# EAGLE board PROIECT TSC v114 (EAGLE 9.7.0)
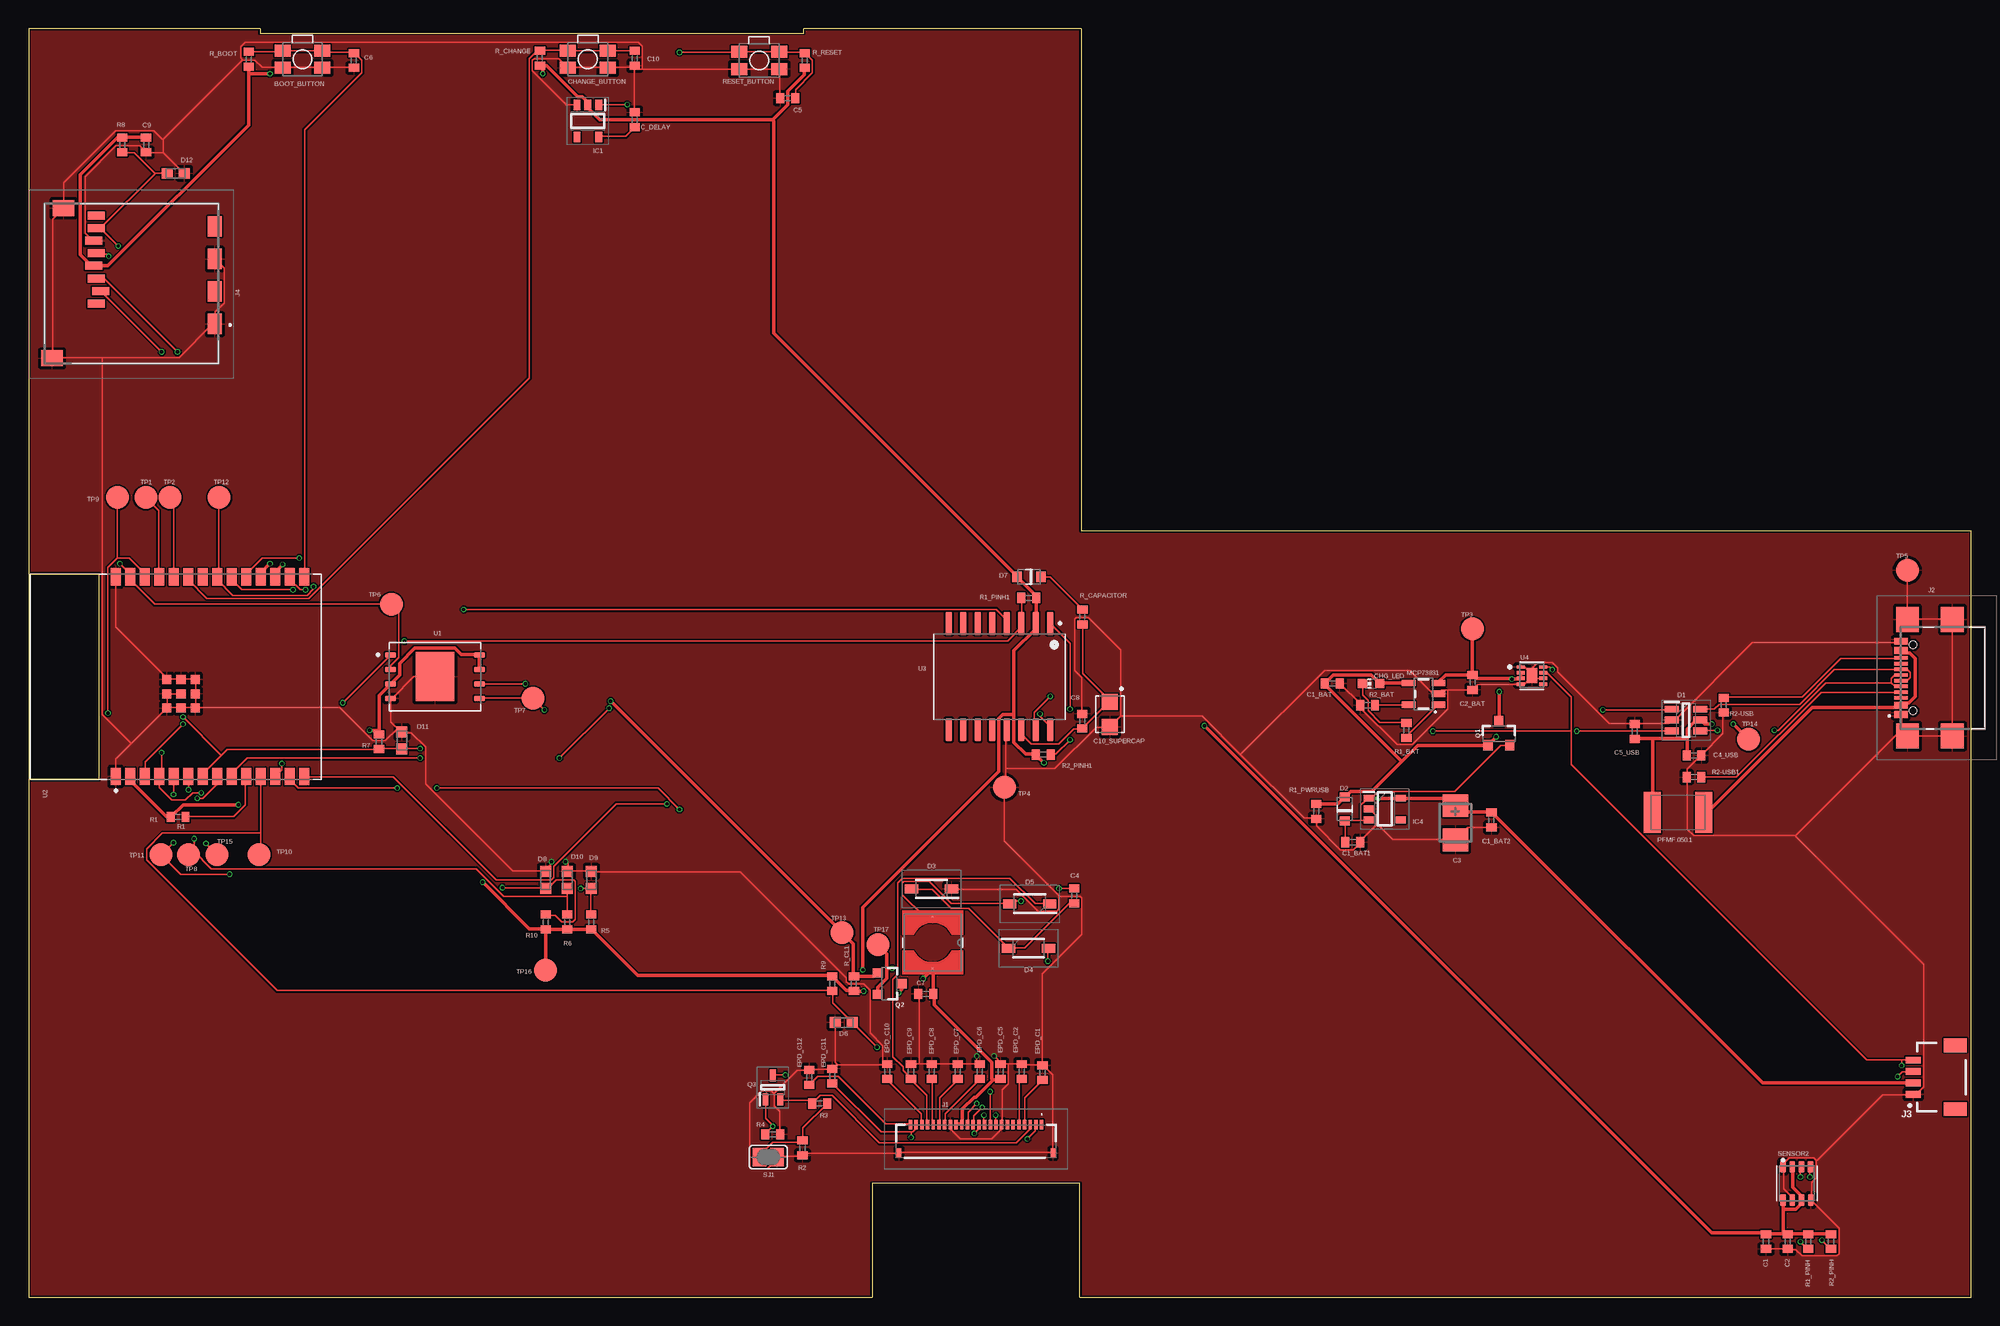
[diagram p0: board, top side]
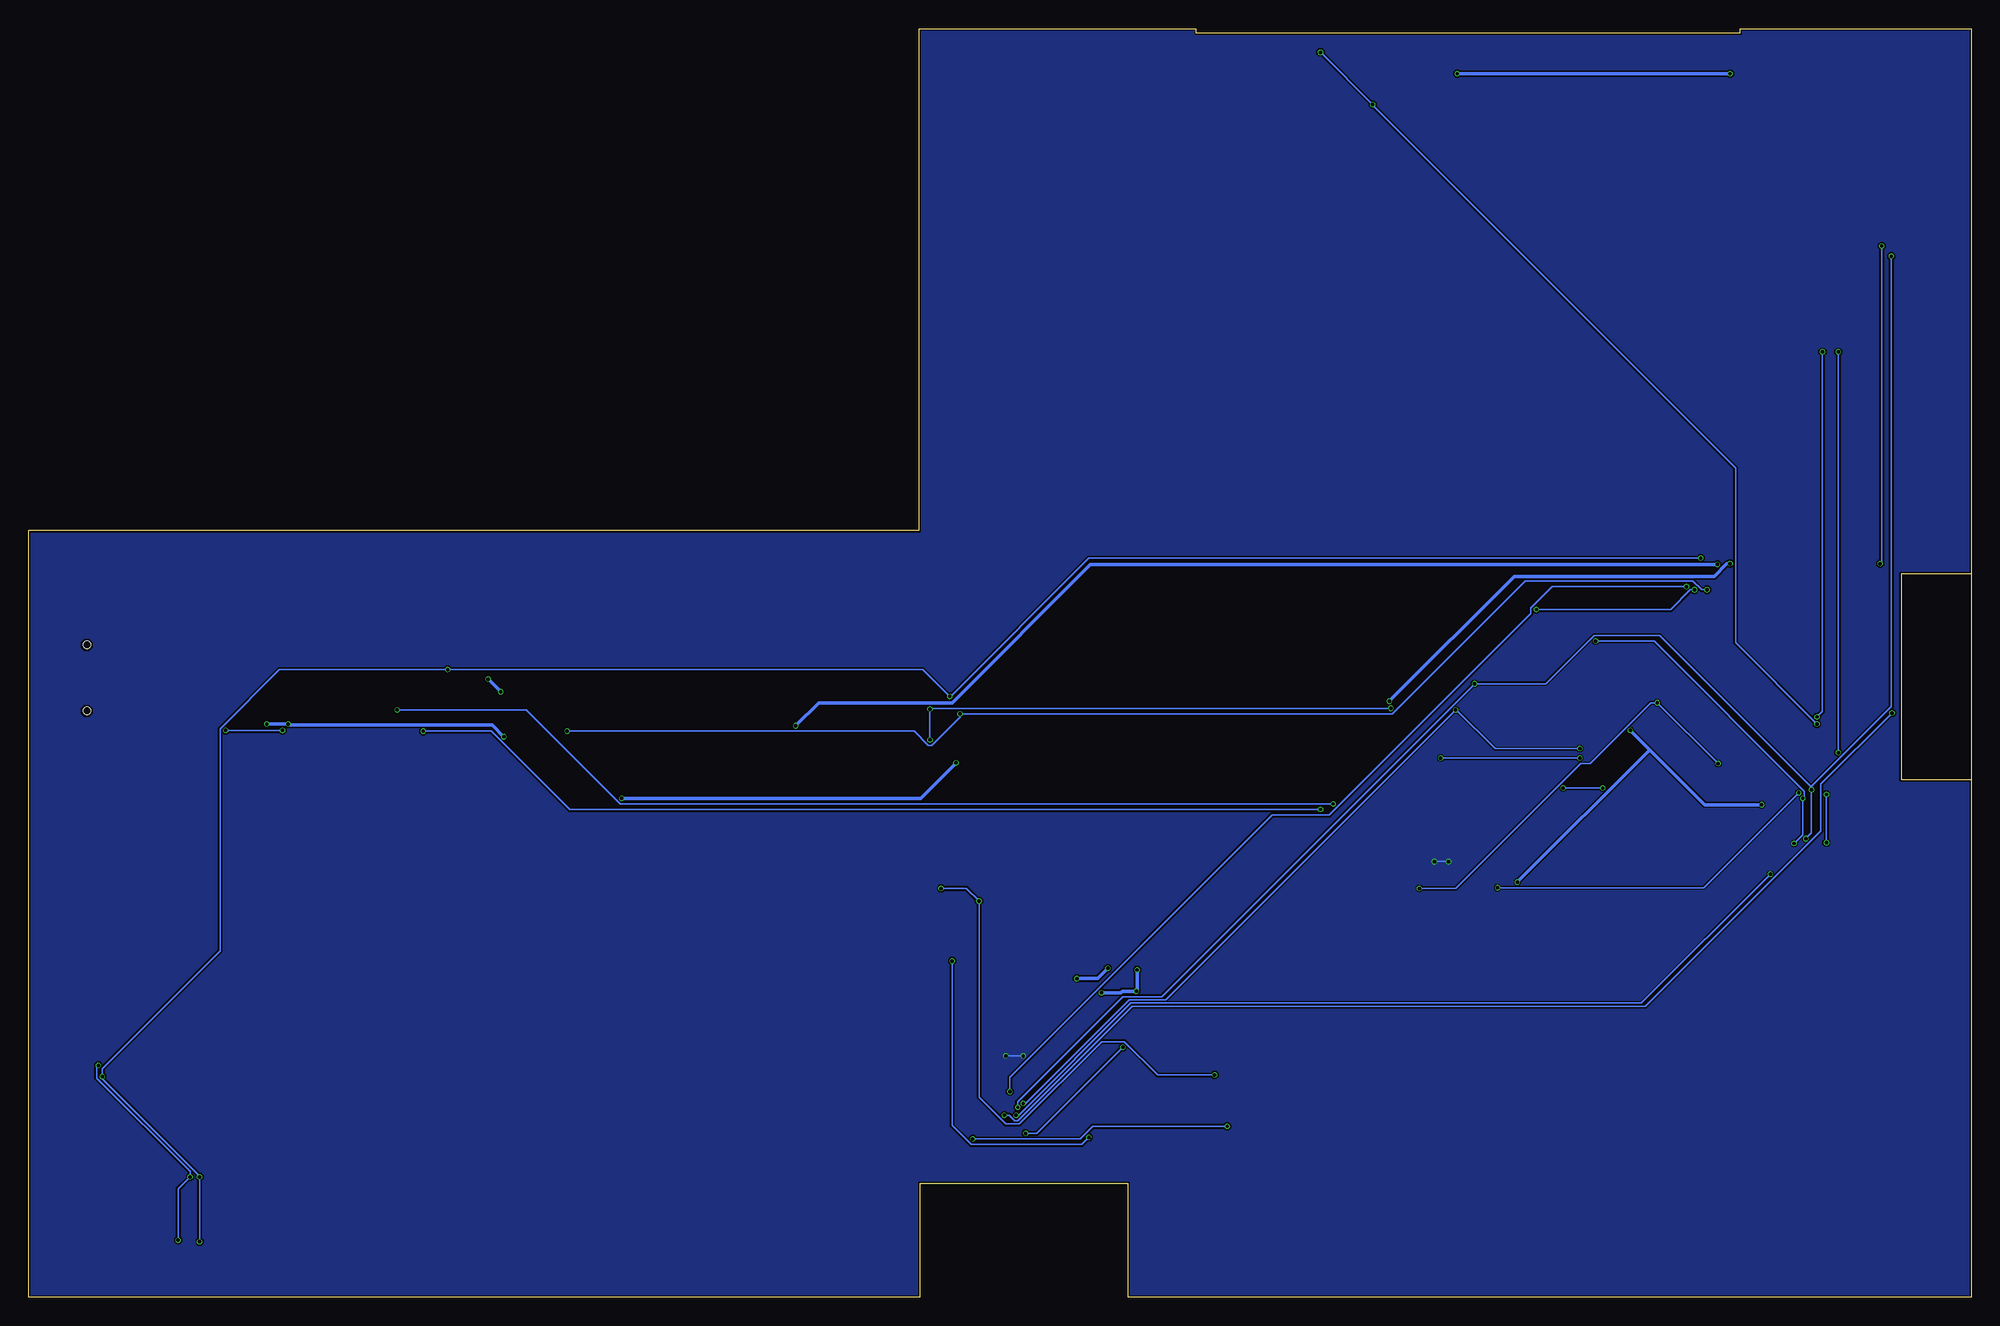
[diagram p1: board, bottom side, seen from below]

Size 170.2 x 111.2 mm. Coordinates in mm from the lower left corner, seen from the top.
Outline: 0,63.4 0,111.2 20.3,111.2 20.3,110.8 67.9,110.8 67.9,111.2 92.2,111.2 92.2,67.2 170.2,67.2 170.2,0 92.1,0 92.1,10 73.9,10 73.9,0 0,0 0,45.4
Outline: 0,63.4 0,45.4
Outline: 0,63.4 6.16,63.4 6.16,45.4 0,45.4
Copper layers (1*16): Top / Bottom
Stack-up Default Layer Stack: Top User Defined 0.035mm / Dielectric-1 User Defined 1mm / Bottom User Defined 0.035mm
Design rules: minimum copper width classes=1 0.3mm, minimum copper width classes=0 0.15mm, minimum copper width 5mil, minimum drill size 0.3mm, copper clearance wire_polygon to wire_polygon 5mil, copper clearance wire_polygon to pad_smd 5mil, copper clearance wire_polygon to via 5mil, copper clearance pad_smd to pad_smd 5mil, copper clearance pad_smd to via 5mil, copper clearance via to via 5mil, copper clearance smd to pad (same net) 0.11mm, copper clearance smd to via (same net) 0.11mm, copper clearance smd to smd (same net) 0.11mm, dimension clearance 0.2mm, via restrict clearance 5mil, restrict clearance 5mil, drill distance 6mil, keepout clearance 0mil
Net classes: 0 default: width 0.15 mm; 1 POWER: width 0.3 mm

## Footprints (pad centres in the part's own frame; a part is rotated, then mirrored left to right if it is on the bottom)
MYBUTTON = smd 1.4 x 1.05: 1 1.75,0.75; 2 -1.75,0.75; 3 -1.75,-0.75; 4 1.75,-0.75
EAGLE-LTSPICE_C0402 = smd 0.7 x 0.9: 1 -0.65,0; 2 0.65,0
RCL_CT3528 = smd 2 x 2.2: + -1.5,0; - 1.5,0
CAPCP3225X100N = smd 1.4 x 1.4: 1 -1.1,0; 2 1.1,0
ADAFRUIT_CHIP-LED0603 = smd 0.8 x 0.8: A 0,-0.75; C 0,0.75
SOT95P280X145-6N = smd 1.2 x 0.6: 1 -1.25,0.95; 2 -1.25,0; 3 -1.25,-0.95; 4 1.25,-0.95; 5 1.25,0; 6 1.25,0.95
ESP32_WROVER_AVX---SD0805S020S1R0_AVX_SD0805S020S1R0_0 = smd 0.8 x 0.9: 1 -1.05,0; 2 1.05,0
SOD3716X135N = smd 1.15 x 0.8: 1 -1.75,0; 2 1.75,0
DIOC1608X36N = smd 0.97 x 0.94: 1 -0.75,0; 2 0.75,0
SOT95P280X125-5N = smd 0.9 x 0.6: 1 -1.4,0.95; 2 -1.4,0; 3 -1.4,-0.95; 4 1.4,-0.95; 5 1.4,0.95
SOT95P280X120-5N = smd 0.9 x 0.6: 1 -1.4,0.95; 2 -1.4,0; 3 -1.4,-0.95; 4 1.4,-0.95; 5 1.4,0.95
FH34SRJ24S05SH99 = smd 0.3 x 0.8: 1 5.75,1.45; 2 5.25,1.45; 3 4.75,1.45; 4 4.25,1.45; 5 3.75,1.45; 6 3.25,1.45; 7 2.75,1.45; 8 2.25,1.45; 9 1.75,1.45; 10 1.25,1.45; 11 0.75,1.45; 12 0.25,1.45; 13 -0.25,1.45; 14 -0.75,1.45; 15 -1.25,1.45; 16 -1.75,1.45; 17 -2.25,1.45; 18 -2.75,1.45; 19 -3.25,1.45; 20 -3.75,1.45; 21 -4.25,1.45; 22 -4.75,1.45; 23 -5.25,1.45; 24 -5.75,1.45 | smd 0.4 x 0.8: MP1 6.75,-1.05; MP2 -6.75,-1.05
SAMACSYS_PARTS_USB4110GFA = smd 0.3 x 1.15: A1 -3.35,3.678; A4 -2.55,3.678; A5 -1.25,3.678; A6 -0.25,3.678; A7 0.25,3.678; A8 1.25,3.678; A9 2.55,3.678; A12 3.35,3.678; B1 3.05,3.678; B4 2.25,3.678; B5 1.75,3.678; B6 0.75,3.678; B7 -0.75,3.678; B8 -1.75,3.678; B9 -2.25,3.678; B12 -3.05,3.678 | smd 2.18 x 2: MP1 -5.11,-0.827; MP2 5.11,-0.827; MP3 -5.11,3.103; MP4 5.11,3.103 | hole 0.65: -2.89,2.603; 2.89,2.603
JST04_1MM_RA = smd 0.6 x 1.35: 1 -1.5,0; 2 -0.5,0; 3 0.5,0; 4 1.5,0 | smd 1.2 x 2: NC1 2.8,-3.675; NC2 -2.8,-3.675
112ATAARR03ATTEND = smd 1.8 x 1.2: G1 10.6,10.4; G2 4.9,10.4; S1 7.75,10.4; S2 2.05,10.4 | smd 1.4 x 1.9: G3 13.6,-3.85; G4 0.45,-2.85 | smd 0.7 x 1.5: P1 8.8,0; P2 7.7,0.4; P3 6.6,0; P4 5.5,-0.2; P5 4.4,0; P6 3.3,-0.2; P7 2.2,0; P8 1.1,0
IND_4828-WE-TPC_WRE = smd 0.127 x 0.127: 1 -2.286,0; 2 2.286,0
ESP32_WROVER_SPARKFUN-IC-POWER_SOT23-5 = smd 0.55 x 1.2: 1 -0.95,-1.3; 2 0,-1.3; 3 0.95,-1.3; 4 0.95,1.3; 5 -0.95,1.3
ESP32C6_VARISTOR_CT/CN1812 = smd 1.5 x 3.6: 1 -2.25,0; 2 2.25,0
ESP32_WROVER_SPARKFUN-DISCRETESEMI_SOT23-3 = smd 0.8 x 0.9: 1 -0.95,-1; 2 0.95,-1; 3 0,1.1
SOT65P210X110-3N = smd 1.05 x 0.5: 1 -1.05,0.65; 2 -1.05,-0.65; 3 1.05,0
ESP32_WROVER_EAGLE-LTSPICE_R0402 = smd 0.7 x 0.9: 1 -0.65,0; 2 0.65,0
ESP32_WROVER_BME680_PSON80P300X300X100-8N = smd 1.016 x 0.5: 1 1.458,1.2; 2 1.458,0.4; 3 1.458,-0.4; 4 1.458,-1.2; 5 -1.458,-1.22; 6 -1.458,-0.4; 7 -1.458,0.4; 8 -1.458,1.2
SJ = smd 1.168 x 1.6: 1 -0.762,0; 2 0.762,0
TP20R = smd 2 x 2: TP 0,0
SON127P600X800X80-9N = smd 0.94 x 0.44: 1 -3.895,1.905; 2 -3.895,0.635; 3 -3.895,-0.635; 4 -3.895,-1.905; 5 3.895,-1.905; 6 3.895,-0.635; 7 3.895,0.635; 8 3.895,1.905 | smd 3.4 x 4.3: 9 0,0
XCVR_ESP32-C6-WROOM-1-N8 = smd 1.5 x 0.9: 1 -8.75,5.26; 2 -8.75,3.99; 3 -8.75,2.72; 4 -8.75,1.45; 5 -8.75,0.18; 6 -8.75,-1.09; 7 -8.75,-2.36; 8 -8.75,-3.63; 9 -8.75,-4.9; 10 -8.75,-6.17; 11 -8.75,-7.44; 12 -8.75,-8.71; 13 -8.75,-9.98; 14 -8.75,-11.25; 15 8.75,-11.25; 16 8.75,-9.98; 17 8.75,-8.71; 18 8.75,-7.44; 19 8.75,-6.17; 20 8.75,-4.9; 21 8.75,-3.63; 22 8.75,-2.36; 23 8.75,-1.09; 24 8.75,0.18; 25 8.75,1.45; 26 8.75,2.72; 27 8.75,3.99; 28 8.75,5.26 | smd 0.8 x 0.8: 29_1 -2.755,0.79; 29_2 -1.505,0.79; 29_3 -0.255,0.79; 29_4 -2.755,-0.46; 29_5 -1.505,-0.46; 29_6 -0.255,-0.46; 29_7 -2.755,-1.71; 29_8 -1.505,-1.71; 29_9 -0.255,-1.71
SOIC127P1032X265-16N = smd 2.05 x 0.59: 1 -4.655,4.445; 2 -4.655,3.175; 3 -4.655,1.905; 4 -4.655,0.635; 5 -4.655,-0.635; 6 -4.655,-1.905; 7 -4.655,-3.175; 8 -4.655,-4.445; 9 4.655,-4.445; 10 4.655,-3.175; 11 4.655,-1.905; 12 4.655,-0.635; 13 4.655,0.635; 14 4.655,1.905; 15 4.655,3.175; 16 4.655,4.445
SON50P200X200X80-9N = smd 0.76 x 0.27: 1 -0.985,0.75; 2 -0.985,0.25; 3 -0.985,-0.25; 4 -0.985,-0.75; 5 0.985,-0.75; 6 0.985,-0.25; 7 0.985,0.25; 8 0.985,0.75 | smd 0.9 x 1.3: 9 0,0

## Placement (x,y rotation side)
BOOT_BUTTON  BUTTON_CUSYOMV1  [MYBUTTON]  24,108.5 180 top
C1  100nF  [EAGLE-LTSPICE_C0402]  152.2,4.9 270 top
C1_BAT  4.7uF  [EAGLE-LTSPICE_C0402]  114.2,53.8 0 top
C1_BAT1  4.7uF  [EAGLE-LTSPICE_C0402]  116,39.9 0 top
C1_BAT2  4.7uF  [EAGLE-LTSPICE_C0402]  128.15,41.84 270 top
C2  100nF  [EAGLE-LTSPICE_C0402]  154.1,4.9 270 top
C2_BAT  4.7uF  [EAGLE-LTSPICE_C0402]  126.5,53.9 270 top
C3  100uF  [RCL_CT3528]  125,41.6 270 top
C4  4.7uF/25V  [EAGLE-LTSPICE_C0402]  91.6,35.2 90 top
C4_USB  100nF  [EAGLE-LTSPICE_C0402]  145.9,47.5 0 top
C5  1uF  [EAGLE-LTSPICE_C0402]  66.5,105.1 180 top
C5_USB  4.7uF  [EAGLE-LTSPICE_C0402]  140.7,49.6 90 top
C6  100nF  [EAGLE-LTSPICE_C0402]  28.5,108.4 270 top
C7  10uF  [EAGLE-LTSPICE_C0402]  78.6,26.6 180 top
C8  100nF  [EAGLE-LTSPICE_C0402]  92.3,50.5 90 top
C9  100uF  [EAGLE-LTSPICE_C0402]  10.3,101 270 top
C10  100nF  [EAGLE-LTSPICE_C0402]  53.1,108.58 270 top
C10_SUPERCAP  CPH3225A  [CAPCP3225X100N]  94.73,51.09 270 top
C_DELAY  100nF  [EAGLE-LTSPICE_C0402]  53.1,103.2 90 top
CHANGE_BUTTON  BUTTON_CUSYOMV1  [MYBUTTON]  49,108.5 180 top
CHG_LED  [ADAFRUIT_CHIP-LED0603]  117.6,53.8 90 top
D1  USBLC6-2SC6Y  [SOT95P280X145-6N]  145.2,50.6 0 top
D2  ESP32_WROVER_AVX---SD0805S020S1R0_AVX_SD0805S020S1R0_0_0AVX_SD0805S020S1R0_0_0  [ESP32_WROVER_AVX---SD0805S020S1R0_AVX_SD0805S020S1R0_0]  115.3,42.8 90 top
D3  MBR0530  [SOD3716X135N]  79.1,35.8 180 top
D4  MBR0530  [SOD3716X135N]  87.6,30.6 0 top
D5  MBR0530  [SOD3716X135N]  87.7,34.5 180 top
D6  PGB1010603MR  [DIOC1608X36N]  71.4,24.1 0 top
D7  ESP32_WROVER_AVX---SD0805S020S1R0_AVX_SD0805S020S1R0_0_0AVX_SD0805S020S1R0_0_0  [ESP32_WROVER_AVX---SD0805S020S1R0_AVX_SD0805S020S1R0_0]  87.64,63.16 180 top
D8  PGB1010603MR  [DIOC1608X36N]  45.3,36.6 270 top
D9  PGB1010603MR  [DIOC1608X36N]  49.3,36.6 270 top
D10  PGB1010603MR  [DIOC1608X36N]  47.2,36.6 270 top
D11  PGB1010603MR  [DIOC1608X36N]  32.7,48.8 270 top
D12  PGB1010603MR  [DIOC1608X36N]  12.9,98.5 180 top
EPD_C1  1uF/50V  [EAGLE-LTSPICE_C0402]  88.83,19.7 90 top
EPD_C2  1uF/50V  [EAGLE-LTSPICE_C0402]  87,19.8 90 top
EPD_C5  1uF/50V  [EAGLE-LTSPICE_C0402]  85.15,19.8 90 top
EPD_C6  1uF/50V  [EAGLE-LTSPICE_C0402]  83.33,19.8 90 top
EPD_C7  1uF/50V  [EAGLE-LTSPICE_C0402]  81.4,19.8 90 top
EPD_C8  1uF/50V  [EAGLE-LTSPICE_C0402]  79.13,19.8 90 top
EPD_C9  1uF/50V  [EAGLE-LTSPICE_C0402]  77.3,19.8 90 top
EPD_C10  1uF/50V  [EAGLE-LTSPICE_C0402]  75.23,19.8 90 top
EPD_C11  1uF/50V  [EAGLE-LTSPICE_C0402]  70.4,19.4 90 top
EPD_C12  1uF/50V  [EAGLE-LTSPICE_C0402]  68.4,19.3 90 top
IC1  BD5229G-TR  [SOT95P280X125-5N]  49,103.1 270 top
IC4  XC6220A331MR-G  [SOT95P280X120-5N]  118.8,42.8 0 top
J1  FH34SRJ-24S-0.5SH_99_  [FH34SRJ24S05SH99]  83,13.7 0 top
J2  SAMACSYS_PARTS_USB4110-GF-A  [SAMACSYS_PARTS_USB4110GFA]  167.7,54.3 90 top
J3  QWIIC_RIGHT_ANGLE  [JST04_1MM_RA]  165.1,19.3 90 top
J4  112A-TAAR-R03_ATTEND  [112ATAARR03ATTEND]  5.92,95.9 270 top
L1  68uH  [IND_4828-WE-TPC_WRE]  79.2,31.1 270 top
MCP73831  ESP32_WROVER_SPARKFUN-IC-POWER_MCP73831  [ESP32_WROVER_SPARKFUN-IC-POWER_SOT23-5]  122.2,52.9 90 top
PFMF.050.1  ESP32C6_VARISTORCN1812  [ESP32C6_VARISTOR_CT/CN1812]  144.5,42.5 180 top
Q1  20V/4.2A/52mΩ/1.4W  [ESP32_WROVER_SPARKFUN-DISCRETESEMI_SOT23-3]  128.8,49.4 0 top
Q2  20V/4.2A/52mΩ/1.4W  [ESP32_WROVER_SPARKFUN-DISCRETESEMI_SOT23-3]  75.4,27.5 270 top
Q3  SI1308EDL-T1-GE3  [SOT65P210X110-3N]  65.2,18.4 90 top
R1  10k  [ESP32_WROVER_EAGLE-LTSPICE_R0402]  13.1,42.1 180 top
R1_BAT  200  [ESP32_WROVER_EAGLE-LTSPICE_R0402]  120.7,49.7 270 top
R1_PINH  10k  [ESP32_WROVER_EAGLE-LTSPICE_R0402]  155.9,4.9 90 top
R1_PINH1  10k  [ESP32_WROVER_EAGLE-LTSPICE_R0402]  87.62,61.31 180 top
R1_PWRUSB  100k  [ESP32_WROVER_EAGLE-LTSPICE_R0402]  112.8,42.6 90 top
R2  2.2  [ESP32_WROVER_EAGLE-LTSPICE_R0402]  67.8,13.1 90 top
R2-USB  5k1  [ESP32_WROVER_EAGLE-LTSPICE_R0402]  148.5,51.9 270 top
R2-USB1  5k1  [ESP32_WROVER_EAGLE-LTSPICE_R0402]  145.9,45.6 0 top
R2_BAT  2k  [ESP32_WROVER_EAGLE-LTSPICE_R0402]  117.3,51.9 0 top
R2_PINH  10k  [ESP32_WROVER_EAGLE-LTSPICE_R0402]  157.9,4.9 90 top
R2_PINH1  10k  [ESP32_WROVER_EAGLE-LTSPICE_R0402]  88.88,47.57 0 top
R3  0.47  [ESP32_WROVER_EAGLE-LTSPICE_R0402]  69.3,17 180 top
R4  10k  [ESP32_WROVER_EAGLE-LTSPICE_R0402]  65.2,14.3 180 top
R5  10k  [ESP32_WROVER_EAGLE-LTSPICE_R0402]  49.3,32.9 270 top
R6  10k  [ESP32_WROVER_EAGLE-LTSPICE_R0402]  47.2,32.9 270 top
R7  10k  [ESP32_WROVER_EAGLE-LTSPICE_R0402]  30.7,48.7 90 top
R8  10k  [ESP32_WROVER_EAGLE-LTSPICE_R0402]  8.2,101 90 top
R9  10k  [ESP32_WROVER_EAGLE-LTSPICE_R0402]  70.4,27.5 90 top
R10  10k  [ESP32_WROVER_EAGLE-LTSPICE_R0402]  45.3,32.9 270 top
R_BOOT  10k  [ESP32_WROVER_EAGLE-LTSPICE_R0402]  19.3,108.5 270 top
R_CAPACITOR  15  [ESP32_WROVER_EAGLE-LTSPICE_R0402]  92.32,59.64 90 top
R_CHANGE  10k  [ESP32_WROVER_EAGLE-LTSPICE_R0402]  44.8,108.61 270 top
R_CL1  10k  [ESP32_WROVER_EAGLE-LTSPICE_R0402]  72.3,27.5 270 top
R_RESET  10k  [ESP32_WROVER_EAGLE-LTSPICE_R0402]  68,108.4 270 top
RESET_BUTTON  BUTTON_CUSYOMV1  [MYBUTTON]  64,108.4 180 top
SENSOR2  ESP32_WROVER_BME680_BME680  [ESP32_WROVER_BME680_PSON80P300X300X100-8N]  154.9,10 90 top
SJ1  [SJ]  64.8,12.3 180 top
TP1  TPTP20R  [TP20R]  10.27,70.1 0 top
TP2  TPTP20R  [TP20R]  12.4,70.1 0 top
TP3  TPTP20R  [TP20R]  126.48,58.58 0 top
TP4  TPTP20R  [TP20R]  85.48,44.7 0 top
TP5  TPTP20R  [TP20R]  164.58,63.72 0 top
TP6  TPTP20R  [TP20R]  31.78,60.74 0 top
TP7  TPTP20R  [TP20R]  44.2,52.5 0 top
TP8  TPTP20R  [TP20R]  14,38.8 0 top
TP9  TPTP20R  [TP20R]  7.8,70.1 0 top
TP10  TPTP20R  [TP20R]  20.2,38.8 0 top
TP11  TPTP20R  [TP20R]  11.6,38.8 0 top
TP12  TPTP20R  [TP20R]  16.7,70.1 0 top
TP13  TPTP20R  [TP20R]  71.28,31.98 0 top
TP14  TPTP20R  [TP20R]  150.68,48.9 0 top
TP15  TPTP20R  [TP20R]  16.5,38.8 0 top
TP16  TPTP20R  [TP20R]  45.3,28.7 0 top
TP17  TPTP20R  [TP20R]  74.4,30.9 0 top
U1  W25Q512JVEIQ  [SON127P600X800X80-9N]  35.6,54.4 0 top
U2  ESP32-C6-WROOM-1-N8  [XCVR_ESP32-C6-WROOM-1-N8]  12.9,54.4 90 top
U3  DS3231SN#  [SOIC127P1032X265-16N]  85.05,54.4 270 top
U4  MAX17048G+T10  [SON50P200X200X80-9N]  131.7,54.5 0 top

## Library data of the parts
BOOT_BUTTON CHANGE_BUTTON CHG_LED PFMF.050.1 RESET_BUTTON SJ1 TP1-TP17 = DeskAssistant v19 v1
C1 C1_BAT C1_BAT1 C1_BAT2 C2 C2_BAT C4 C4_USB C5 C5_USB C6-C10 C_DELAY EPD_C1 EPD_C2 EPD_C5-EPD_C12 = DeskAssistant v19 v1; SPICEMODEL: NONE; SPICEPREFIX: C
C3 = DeskAssistant v19 v1; SPICEPREFIX: C
C10_SUPERCAP = DeskAssistant v19 v1; AVAILABILITY: Not in stock; CHECK_PRICES: https://www.snapeda.com/parts/CPH3225A/Seiko+Instruments/view-part/?ref=eda; DESCRIPTION: 11 mF (EDLC) Supercapacitor 3.3 V 1210 (3225 Metric) - -; MF: Seiko Instruments; MP: CPH3225A; PACKAGE: 1210 Seiko; PRICE: None; PURCHASE-URL: https://www.snapeda.com/api/url_track_click_mouser/?unipart_id=562593&manufacturer=Seiko Instruments&part_name=CPH3225A&search_term=None; SNAPEDA_LINK: https://www.snapeda.com/parts/CPH3225A/Seiko+Instruments/view-part/?ref=snap
D1 = DeskAssistant v19 v1; AVAILABILITY: In Stock; CHECK_PRICES: https://www.snapeda.com/parts/USBLC6-2SC6Y/STMicroelectronics/view-part/?ref=eda; DESCRIPTION: 17V Clamp 5A (8/20µs) Ipp Tvs Diode Surface Mount SOT-23-6; MF: STMicroelectronics; MP: USBLC6-2SC6Y; PACKAGE: SOT-23-6 STMicroelectronics; PRICE: None; SNAPEDA_LINK: https://www.snapeda.com/parts/USBLC6-2SC6Y/STMicroelectronics/view-part/?ref=snap
D2 D7 = DeskAssistant v19 v1; CENTROID_NOT_SPECIFIED: No; DATASHEET: http://datasheets.avx.com/schottky.pdf; DIGIKEY_DESCRIPTION: DIODE SCHOTTKY 20V 1A 0805; DIGIKEY_PART_NUMBER: 478-7800-1-ND; LEAD_FREE: yes; MF: AVX; MOUSER_PART_NUMBER: 581-SD0805S020S1R0; PACKAGE: 0805 (2012 metric); PREFIX: D; ROHS: yes; TEMPERATURE_RANGE_HIGH: +125°C; TEMPERATURE_RANGE_LOW: -55°C
D3-D5 = DeskAssistant v19 v1; AVAILABILITY: In Stock; CHECK_PRICES: https://www.snapeda.com/parts/MBR0530/Onsemi/view-part/?ref=eda; DESCRIPTION: Diode Schottky 30 V 500mA Surface Mount SOD-123; MF: ON Semiconductor; MP: MBR0530; PACKAGE: SOD-123-2 ON Semiconductor; PRICE: None; PURCHASE-URL: https://www.snapeda.com/api/url_track_click_mouser/?unipart_id=179458&manufacturer=ON Semiconductor&part_name=MBR0530&search_term=None; SNAPEDA_LINK: https://www.snapeda.com/parts/MBR0530/Onsemi/view-part/?ref=snap
D6 D8-D12 = DeskAssistant v19 v1; AVAILABILITY: In Stock; CHECK_PRICES: https://www.snapeda.com/parts/PGB1010603MR/Littelfuse/view-part/?ref=eda; DESCRIPTION: 150V (Typ) Clamp - Ipp Tvs Diode Surface Mount 0603 (1608 Metric); MF: Littelfuse Inc.; MP: PGB1010603MR; PACKAGE: 0603 Littelfuse Inc.; PRICE: None; PURCHASE-URL: https://www.snapeda.com/api/url_track_click_mouser/?unipart_id=5659453&manufacturer=Littelfuse Inc.&part_name=PGB1010603MR&search_term=None; SNAPEDA_LINK: https://www.snapeda.com/parts/PGB1010603MR/Littelfuse/view-part/?ref=snap
IC1 = DeskAssistant v19 v1; DESCRIPTION: Voltage Detector with Adjustable Delay Time: CMOS processes are utilized to develop high precision, low current consumption CMOS reset ICs that allow arbitrary setting of the delay time. The extensive lineup includes both Nch Open Drain and CMOS output types in a wide range of detection voltages (from 2.3V to 6.0V, in 0.1V steps), enabling selection of the ideal solution based on customer requirements. In addition, the entire series is of course both lead-free and RoHS-compliant.; HEIGHT: 1.25mm; MANUFACTURER_NAME: ROHM Semiconductor; MANUFACTURER_PART_NUMBER: BD5229G-TR; MOUSER_PART_NUMBER: 755-BD5229G-TR; MOUSER_PRICE-STOCK: https://www.mouser.co.uk/ProductDetail/ROHM-Semiconductor/BD5229G-TR?qs=4kLU8WoGk0vvnhrrYwdszw%3D%3D
IC4 = DeskAssistant v19 v1; DESCRIPTION: LDO Voltage Regulators; HEIGHT: 1.2mm; MANUFACTURER_NAME: Torex; MANUFACTURER_PART_NUMBER: XC6220A331MR-G; MOUSER_PART_NUMBER: 865-XC6220A331MR-G; MOUSER_PRICE-STOCK: https://www.mouser.co.uk/ProductDetail/Torex-Semiconductor/XC6220A331MR-G?qs=AsjdqWjXhJ8ZSWznL1J0gg%3D%3D
J1 = DeskAssistant v19 v1; DESCRIPTION: 24 Position FFC, FPC Connector Contacts, Top and Bottom 0.020" (0.50mm) Surface Mount, Right Angle; HEIGHT: 1.1mm; MANUFACTURER_NAME: Hirose; MANUFACTURER_PART_NUMBER: FH34SRJ-24S-0.5SH(99); MOUSER_PART_NUMBER: 798-FH34SRJ24S05SH99; MOUSER_PRICE-STOCK: https://www.mouser.co.uk/ProductDetail/Hirose-Connector/FH34SRJ-24S-0.5SH99?qs=vcbW%252B4%252BSTIpKBl5ap9J8Fw%3D%3D
J2 = DeskAssistant v19 v1; DESCRIPTION: CONN USB 2.0 TYPE-C R/A SMT; HEIGHT: 3.26mm; MANUFACTURER_NAME: GCT (GLOBAL CONNECTOR TECHNOLOGY); MANUFACTURER_PART_NUMBER: USB4110-GF-A; MOUSER_PART_NUMBER: 640-USB4110-GF-A; MOUSER_PRICE-STOCK: https://www.mouser.co.uk/ProductDetail/GCT/USB4110-GF-A?qs=KUoIvG%2F9IlYiZvIXQjyJeA%3D%3D
J3 = DeskAssistant v19 v1; PROD_ID: CONN-13694
J4 = DeskAssistant v19 v1; DESCRIPTION: Micro SD Card Socket, Push-Push Type, Top Mount, SMT, H=1.83mm, 10u; HEIGHT: 1.9mm; MANUFACTURER_NAME: ATTEND; MANUFACTURER_PART_NUMBER: 112A-TAAR-R03 ATTEND
L1 = DeskAssistant v19 v1; COPYRIGHT: Copyright (C) 2024 Ultra Librarian. All rights reserved.; MANUFACTURER_PART_NUMBER: 744043680; MFR_NAME: Wurth Electronics
MCP73831 = DeskAssistant v19 v1; PROD_ID: IC-09995
Q1 Q2 = DeskAssistant v19 v1; PROD_ID: TRAN-14388
Q3 = DeskAssistant v19 v1; AVAILABILITY: In Stock; CHECK_PRICES: https://www.snapeda.com/parts/SI1308EDL-T1-GE3/Vishay+Siliconix/view-part/?ref=eda; DESCRIPTION: Si1308EDL-T1-GE3 N-channel MOSFET Transistor, 1.5 A, 30 V, 3-Pin SC-70 | Siliconix / Vishay SI1308EDL-T1-GE3; MF: Vishay Siliconix; MP: SI1308EDL-T1-GE3; PACKAGE: SOT-323 Vishay Semiconductor; PRICE: None; PURCHASE-URL: https://www.snapeda.com/api/url_track_click_mouser/?unipart_id=274603&manufacturer=Vishay Siliconix&part_name=SI1308EDL-T1-GE3&search_term=None; SNAPEDA_LINK: https://www.snapeda.com/parts/SI1308EDL-T1-GE3/Vishay+Siliconix/view-part/?ref=snap
R1 R1_BAT R1_PINH R1_PINH1 R1_PWRUSB R2 R2-USB R2-USB1 R2_BAT R2_PINH R2_PINH1 R3-R10 R_BOOT R_CAPACITOR R_CHANGE R_CL1 R_RESET = DeskAssistant v19 v1; SPICEMODEL: NONE; SPICEPREFIX: R
SENSOR2 = DeskAssistant v19 v1; AVAILABILITY: Unavailable; DESCRIPTION: Integrated Environmental Unit; MF: Bosch Sensortec; MP: BME680; PACKAGE: LGA-8 Bosch Tools; PRICE: None
U1 = DeskAssistant v19 v1; AVAILABILITY: In Stock; CHECK_PRICES: https://www.snapeda.com/parts/W25Q512JVEIQ/Winbond+Electronics/view-part/?ref=eda; DESCRIPTION: FLASH - NOR Memory IC 512Mb (64M x 8) SPI - Quad I/O 133 MHz 8-WSON (8x6); MF: Winbond Electronics; MP: W25Q512JVEIQ; PACKAGE: Package; PRICE: None; SNAPEDA_LINK: https://www.snapeda.com/parts/W25Q512JVEIQ/Winbond+Electronics/view-part/?ref=snap
U2 = DeskAssistant v19 v1; AVAILABILITY: In Stock; CHECK_PRICES: https://www.snapeda.com/parts/ESP32-C6-WROOM-1-N8/Espressif+Systems/view-part/?ref=eda; DESCRIPTION: Multiprotocol Modules ESP32-C6 module, Wi-Fi 6 in 2.4 GHz band, Bluetooth 5, Zigbee 3.0 and Thread. ESP34-WROOM Compatible - ENGINEERING SAMPLE; MF: Espressif Systems; MP: ESP32-C6-WROOM-1-N8; PACKAGE: None; PRICE: None; SNAPEDA_LINK: https://www.snapeda.com/parts/ESP32-C6-WROOM-1-N8/Espressif+Systems/view-part/?ref=snap
U3 = DeskAssistant v19 v1; AVAILABILITY: In Stock; CHECK_PRICES: https://www.snapeda.com/parts/DS3231SN%23/Analog+Devices/view-part/?ref=eda; DESCRIPTION: Extremely Accurate I²C-Integrated RTC/TCXO/Crystal; MF: Analog Devices; MP: DS3231SN#; PACKAGE: SOIC-16 Maxim; PRICE: None; PURCHASE-URL: https://www.snapeda.com/api/url_track_click_mouser/?unipart_id=99048&manufacturer=Analog Devices&part_name=DS3231SN#&search_term=None; SNAPEDA_LINK: https://www.snapeda.com/parts/DS3231SN%23/Analog+Devices/view-part/?ref=snap
U4 = DeskAssistant v19 v1; AVAILABILITY: In Stock; CHECK_PRICES: https://www.snapeda.com/parts/MAX17048G+T10/Analog+Devices/view-part/?ref=eda; DESCRIPTION: 3µA 1-Cell/2-Cell Fuel Gauge with ModelGauge; MF: Analog Devices; MP: MAX17048G+T10; PACKAGE: TDFN-8 Maxim; PRICE: None; PURCHASE-URL: https://www.snapeda.com/api/url_track_click_mouser/?unipart_id=329239&manufacturer=Analog Devices&part_name=MAX17048G+T10&search_term=None; SNAPEDA_LINK: https://www.snapeda.com/parts/MAX17048G+T10/Analog+Devices/view-part/?ref=snap

## Nets
3V3 [POWER]: C1_BAT2.1 C3.+ C9.1 D7.2 IC1.2 IC4.5 J3.2 J4.P4 Q2.3 R1.2 R1_PINH1.1 R2_PINH1.1 R5.2 R6.2 R7.2 R8.2 R9.2 R10.2 R_BOOT.2 R_CHANGE.2 R_CL1.2 R_RESET.2 TP16.TP U1.3 U1.7 U1.8 U2.2 U3.2
32KHZ: R2_PINH1.2 U2.9 U3.1
DN: D1.4 J2.A7 J2.B7
DP: D1.6 J2.A6 J2.B6
EPD_3V3 [POWER]: C7.1 EPD_C5.1 J1.15 J1.16 L1.2 Q2.2 TP17.TP
EPD_3V3_C [POWER]: Q2.1 R_CL1.1 TP13.TP U2.18
EPD_BUSY: J1.9 TP9.TP U2.26
EPD_CS: D6.2 J1.12 R9.1 TP10.TP U2.11
EPD_DC: J1.11 TP11.TP U2.5
EPD_RST: J1.10 TP12.TP U2.21
FLASH_CS: D9.2 R5.1 U1.1 U2.12
GDR: J1.2 Q3.1 R4.2
GND: BOOT_BUTTON.1 BOOT_BUTTON.2 C1.2 C1_BAT1.2 C1_BAT2.2 C1_BAT.2 C2.2 C2_BAT.2 C3.- C4_USB.2 C5.2 C5_USB.2 C6.2 C7.2 C8.2 C9.2 C10.2 C10_SUPERCAP.2 C_DELAY.2 CHANGE_BUTTON.1 CHANGE_BUTTON.2 D1.2 D3.1 D6.1 D8.1 D9.1 D10.1 D11.1 D12.1 EPD_C1.2 EPD_C2.2 EPD_C5.2 EPD_C6.2 EPD_C7.2 EPD_C8.2 EPD_C9.2 EPD_C10.2 EPD_C11.2 EPD_C12.2 IC1.3 IC4.2 J1.8 J1.17 J1.MP1 J1.MP2 J2.A1 J2.A12 J2.B1 J2.B12 J2.MP1 J2.MP2 J2.MP3 J2.MP4 J3.1 J4.G1 J4.G2 J4.G3 J4.G4 J4.P6 MCP73831.2 R1_PWRUSB.1 R2-USB1.1 R2-USB.2 R2.1 R2_BAT.1 R4.1 RESET_BUTTON.1 RESET_BUTTON.2 SENSOR2.1 SENSOR2.5 SENSOR2.7 SJ1.1 TP4.TP TP5.TP U1.4 U1.9 U2.1 U2.28 U2.29_1 U2.29_2 U2.29_3 U2.29_4 U2.29_5 U2.29_6 U2.29_7 U2.29_8 U2.29_9 U3.13 U4.1 U4.4 U4.6 U4.9
GPIO8: R1.1 U2.10
I2C_PW [POWER]: C1.1 C2.1 R1_PINH.2 R2_PINH.2 SENSOR2.2 SENSOR2.6 SENSOR2.8 U2.17
INT_RTC: R1_PINH1.2 TP15.TP U2.8 U3.3
IO/BOOT: BOOT_BUTTON.3 BOOT_BUTTON.4 C6.1 R_BOOT.1 U2.15
IO/CHANGE: C10.1 CHANGE_BUTTON.3 CHANGE_BUTTON.4 R_CHANGE.1 U2.23
MISO: D12.2 J4.P7 R8.1 TP6.TP U1.2 U2.27
MOSI: D11.2 J1.14 J4.P3 R7.1 TP7.TP U1.5 U2.7
N$1: C4.1 D3.2 D4.1
N$2: J2.A5 R2-USB1.2
N$3: MCP73831.1 R1_BAT.2
N$4: C1_BAT1.1 D2.1 IC4.1 IC4.3 Q1.2
N$5: CHG_LED.C R1_BAT.1
N$6: MCP73831.5 R2_BAT.2
N$7: EPD_C12.1 J1.24
N$8: EPD_C8.1 J1.20
N$9: EPD_C10.1 J1.22
N$10: EPD_C7.1 J1.19
N$11: EPD_C6.1 J1.18
N$12: J2.B5 R2-USB.1
N$13: EPD_C2.1 J1.5
N$14: EPD_C1.1 J1.4
N$18: C_DELAY.1 IC1.5
N$19: D7.1 R_CAPACITOR.2
PREVGH: D5.1 EPD_C9.1 J1.21
PREVGL: D4.2 EPD_C11.1 J1.23
RESE: J1.3 Q3.2 R3.2
RESE': R2.2 R3.1 SJ1.2
RESET: C5.1 IC1.1 R_RESET.1 RESET_BUTTON.3 RESET_BUTTON.4 U2.3
RTC_RST: U2.16 U3.4
RX: TP2.TP U2.24
SCK: D10.2 J1.13 J4.P5 R6.1 TP8.TP U1.6 U2.6
SCL: J3.4 R2_PINH.1 SENSOR2.4 U2.20 U3.16 U4.7
SDA: J3.3 R1_PINH.1 SENSOR2.3 U2.19 U3.15 U4.8
SRC: C4.2 D5.2 L1.1 Q3.3
SS_SD: D8.2 J4.P2 R10.1 U2.4
TX: TP1.TP U2.25
USB_D+: D1.1 U2.14
USB_D-: D1.3 U2.13
VBAT [POWER]: C2_BAT.1 MCP73831.3 Q1.3 TP3.TP U4.2 U4.3
VBUS [POWER]: C1_BAT.1 C4_USB.1 C5_USB.1 CHG_LED.A D1.5 D2.2 MCP73831.4 PFMF.050.1.2 Q1.1 R1_PWRUSB.2 TP14.TP
VRTC: C8.1 C10_SUPERCAP.1 R_CAPACITOR.1 U3.14
VUSB [POWER]: J2.A4 J2.A9 J2.B4 J2.B9 PFMF.050.1.1

## Tracks (layer width: path | path; a pad name or v marks a point on that pad's centre or on a via)
3V3  (via drill 0.3)
  Top 0.3: J3.2 165.05,18.81 151.89,18.81 128.28,42.42 C1_BAT2.1 128.14,42.56 125.58,42.56 125.1,43.04 C3.+ 124.96,43.11 124.33,43.73 120.25,43.73 IC4.5 120.04,43.73 v118.24,43.73 | U2.2 8.96,45.6 8.96,45.26 12.08,42.14 12.43,42.14 R1.2 12.56,42.21 13.53,43.18 v18.38,43.18 | U1.7 39.5,55.09 39.5,56.27 U1.8 39.36,56.34 37.91,56.34 37.36,56.89 33.82,56.89 32.51,55.58 32.51,54.54 31.82,53.85 U1.3 31.68,53.71 30.71,52.74 30.71,49.41 R7.2 30.57,49.69 v29.88,49.69 | C9.1 10.28,101.7 8.2,101.7 R8.2 8.06,101.63 7.79,101.63 4.53,98.37 4.53,91.38 5.5,90.41 5.57,90.41 J4.P4 5.78,90.41 6.95,90.41 19.28,102.74 19.28,107.24 | 19.28,107.24 19.28,107.79 R_BOOT.2 | 65.19,103.22 66.51,104.54 66.51,105.71 67.97,107.17 67.97,107.72 R_RESET.2 | 65.19,103.22 50.03,103.22 49.06,104.19 49.06,104.4 IC1.2 48.99,104.54 48.99,104.75 48.51,105.23 48.09,105.23 45.39,107.93 44.84,107.93 R_CHANGE.2 45.04,107.79 v45.04,107.24 | 86.32,51.08 86.32,56.69 88.19,58.55 88.19,59.04 U3.2 88.25,59.18 88.25,61.26 R1_PINH1.1 88.25,61.46 86.59,63.13 D7.2 86.52,63.26 65.26,84.52 65.26,103.08 65.19,103.22 | 86.32,51.08 86.32,48.65 87.35,47.61 88.19,47.61 R2_PINH1.1 88.32,47.48 v88.95,46.85 | v76.2,26.7 76.48,26.98 76.48,27.46 Q2.3 | v73.16,26.84 72.4,26.84 R_CL1.2 72.26,26.91 71.64,26.91 70.46,28.08 R9.2 70.32,28.22 53.35,28.22 49.41,32.17 R5.2 49.27,32.24 47.33,32.24 R6.2 45.32,32.24 R10.2 | TP16.TP 45.32,28.71 45.32,32.1 R10.2 | 86.32,51.08 85.35,51.08 85,50.73 85,46.09 73.09,34.18 v73.09,28.71 | v21.15,107.24 19.28,107.24 | v39.78,36.39 43.87,32.31 45.18,32.31 R10.2
  Bottom 0.3: v18.38,43.18 23.37,43.18 28.18,47.99 | v29.88,49.69 28.18,47.99 | v76.2,26.7 74.54,26.7 74.41,26.84 v73.16,26.84 73.09,26.98 v73.09,28.71 | v45.04,107.24 v21.15,107.24 | v39.78,36.39 28.18,47.99 | v118.24,43.73 92.06,43.73 v88.95,46.85
32KHZ  (via drill 0.3)
  Top 0.15: v91.23,48.86 89.99,47.61 89.57,47.61 R2_PINH1.2 | v91.23,51.56 91.23,57.31 89.5,59.04 U3.1 | v34.31,47.27 19.14,47.27 17.83,45.95 17.83,45.67 U2.9 | v50.86,51.63 v46.5,47.27
  Bottom 0.15: v91.23,48.86 v91.23,51.56 91.23,51.63 v50.86,51.63 | v46.5,47.27 v34.31,47.27
DN  (via drill 0.3)
  Top 0.15: 163.18,53.85 163.46,53.57 164.01,53.57 J2.B7 | 163.18,53.85 163.18,54.26 163.46,54.54 J2.A7 | v147.95,49.69 146.49,49.69 D1.4 | v152.93,49.69 153.28,49.69 157.44,53.85 163.18,53.85
  Bottom 0.15: v152.93,49.69 v147.95,49.69
DP
  Top 0.15: J2.A6 164.08,54.05 164.57,54.05 164.84,54.33 164.84,54.75 164.57,55.02 164.08,55.02 J2.B6 164.01,55.02 158.2,55.02 155.15,51.98 148.09,51.98 147.67,51.56 146.49,51.56 D1.6
EPD_3V3  (via drill 0.3)
  Top 0.3: 75.17,28.85 75.17,30.09 74.41,30.85 TP17.TP | 75.17,28.85 75.17,27.95 74.41,27.18 74.41,26.56 Q2.2 | J1.16 81.26,15.2 81.75,15.2 J1.15 81.81,15.34 81.81,16.52 82.85,17.56 82.99,17.56 84.52,19.08 | 84.52,19.08 85.14,19.08 EPD_C5.1 | 84.52,19.08 84.38,19.15 84.38,20.61 79.32,25.66 79.32,26.49 C7.1 79.25,26.63 79.25,28.78 L1.2 78.37,27.98 v78.37,27.95 | v75.65,28.85 75.17,28.85
  Bottom 0.3: v78.37,27.95 76.55,27.95 v75.65,28.85
EPD_3V3_C  (via drill 0.3)
  Top 0.3: Q2.1 74.34,28.43 74.06,28.15 72.33,28.15 R_CL1.1 72.26,28.29 72.26,30.99 71.36,31.89 TP13.TP 71.22,32.03 v51,52.25 | v21.15,64.3 20.39,63.54 20.39,63.2 U2.18
  Bottom 0.3: v21.15,64.3 21.43,64.3 22.54,63.2 40.06,63.2 v51,52.25
EPD_BUSY  (via drill 0.3)
  Top 0.15: v84.72,15.97 84.72,15.2 J1.9 | v6.95,51.21 6.95,63.96 7.79,64.79 | 7.79,64.79 8.83,64.79 10.14,63.47 10.14,63.2 U2.26 | 7.79,64.79 7.79,70.05 TP9.TP
  Bottom 0.15: v84.72,15.97 84.31,15.97 83.82,15.48 83.55,15.48 73.5,25.52 28.56,25.52 13.19,40.9 13.19,44.98 v6.95,51.21
EPD_CS  (via drill 0.3)
  Top 0.15: 20.32,40.69 20.32,38.89 20.25,38.82 TP10.TP | 20.32,40.69 20.32,45.6 U2.11 | v82.85,14.37 83.2,14.72 83.2,15.13 J1.12 | v74.34,21.92 72.19,24.07 D6.2 72.12,24.14 70.46,25.8 70.46,26.84 R9.1 70.39,26.91 21.77,26.91 10.35,38.33 10.35,39.3 11.73,40.69 20.32,40.69
  Bottom 0.15: v82.85,14.37 81.88,14.37 v74.34,21.92
EPD_DC  (via drill 0.3)
  Top 0.15: v83.68,15.97 83.68,15.2 J1.11 | v17.62,37.09 13.33,37.09 11.66,38.75 TP11.TP 11.66,38.82 v12.7,39.86 | v12.7,44.08 12.7,45.6 U2.5
  Bottom 0.15: v83.68,15.97 83.48,15.97 73.64,25.8 28.91,25.8 v17.62,37.09 | v12.7,39.86 v12.7,44.08
EPD_RST  (via drill 0.3)
  Top 0.15: v84.24,18.04 84.24,15.2 J1.10 | v24.96,62.29 24.96,62.09 24.41,61.53 17.9,61.53 16.58,62.85 16.58,63.13 U2.21 16.65,63.13 16.65,70.05 TP12.TP
  Bottom 0.15: v84.24,18.04 84.24,19.29 61.25,42.28 56.26,42.28 38.6,59.94 38.6,60.42 36.73,62.29 v24.96,62.29
FLASH_CS  (via drill 0.3)
  Top 0.15: R5.1 49.27,33.56 49.27,35.84 D9.2 49.2,35.84 v48.37,35.84 | v27.52,52.11 31.68,56.27 U1.1 | v22.19,46.78 22.19,46.23 21.64,45.67 U2.12
  Bottom 0.15: v22.19,46.78 v27.52,52.11 28.08,52.11 33.41,46.78 34.24,46.78 45.18,35.84 v48.37,35.84
GDR  (via drill 0.3)
  Top 0.15: v87.49,13.89 88.19,14.58 88.19,15.13 J1.2 | R4.2 64.5,14.3 v65.19,15 65.19,15.07 64.57,15.69 64.57,17.28 Q3.1
  Bottom 0.15: v87.49,13.89 78.08,13.89 76.97,15 v65.19,15
GND  (via drill 0.3)
  Top 0.15: U2.29_7 14.64,51.7 14.64,52.88 U2.29_8 14.64,52.95 14.64,54.12 U2.29_9 14.57,54.19 13.39,54.19 U2.29_6 13.33,54.19 12.15,54.19 U2.29_3 12.15,54.26 7.65,58.76 7.65,63.13 U2.28 | U2.29_1 12.15,51.7 12.15,52.88 U2.29_2 12.22,52.88 13.33,52.88 U2.29_5 | U2.29_1 12.22,51.7 13.33,51.7 U2.29_4 13.39,51.7 14.57,51.7 U2.29_7 | 9,48.55 12.08,51.63 U2.29_1 | 9,48.55 7.65,47.2 7.65,45.67 U2.1 | D11.1 32.65,49.55 31.75,50.45 31.75,52.46 U1.4 31.82,52.46 33.76,54.4 U1.9 | D11.1 32.72,49.48 33.55,49.48 34.79,48.24 34.79,44.98 42.41,37.36 45.25,37.36 D8.1 45.25,37.43 45.8,37.99 v45.8,38.2 | v47.05,38.2 47.26,37.99 47.26,37.43 D10.1 47.26,37.36 49.27,37.36 D9.1 49.34,37.3 62.36,37.3 71.64,28.02 71.64,27.67 71.84,27.46 73.16,27.46 73.71,26.91 73.71,23.17 74.82,22.06 74.82,20.47 EPD_C10.2 75.17,20.4 70.8,20.4 | U2.29_7 14.71,51.7 27.24,51.7 30.15,48.79 31.26,48.79 32.3,49.83 D11.1 | J4.G2 16.37,90.96 17.14,90.2 17.14,87.16 16.37,86.39 16.37,85.35 J4.G1 16.3,85.29 16.1,85.29 13.19,82.38 6.47,82.38 | 6.47,82.38 2.18,82.38 J4.G3 2.11,82.31 2.11,94.5 3.01,95.4 J4.G4 3.08,95.47 3.08,97.68 7.65,102.25 10.97,102.25 11.73,101.49 11.8,101.49 | C5.2 65.82,105.16 65.82,107.58 RESET_BUTTON.2 65.68,107.65 62.29,107.65 RESET_BUTTON.1 62.22,107.65 53.77,107.65 | IC1.3 48.02,104.54 47.12,104.54 44.14,107.52 44.14,108.41 44.28,108.55 46.43,108.55 47.19,107.79 CHANGE_BUTTON.1 47.26,107.79 50.72,107.79 CHANGE_BUTTON.2 50.79,107.79 53.01,107.79 C10.2 | C_DELAY.2 53.08,103.91 53.08,107.93 C10.2 | 53.77,107.65 53.14,107.65 C10.2 | C6.2 28.49,107.79 25.79,107.79 BOOT_BUTTON.2 25.72,107.79 22.26,107.79 BOOT_BUTTON.1 22.19,107.79 20.46,107.79 19.84,108.41 18.73,108.41
  Top 0.15: 11.8,100.31 10.35,100.31 C9.2 10.28,100.38 9.72,100.94 7.65,100.94 4.95,98.23 4.95,93.25 5.57,92.63 5.71,92.63 J4.P6 | 11.8,100.31 13.6,98.51 D12.1 | 11.8,101.49 18.73,108.41 | 11.8,100.31 11.8,101.49 | 53.77,107.65 53.77,109.66 53.42,110.01 19,110.01 18.59,109.59 18.59,108.62 18.73,108.48 18.73,108.41 | 9,48.55 6.47,51.08 6.47,82.38 | C1.2 152.24,4.26 154.04,4.26 C2.2 154.11,4.19 154.8,4.19 155.36,3.64 158.41,3.64 158.61,3.85 158.61,6.06 156.19,8.49 SENSOR2.5 156.19,8.56 156.19,10.08 156.61,10.5 156.61,12.02 | SENSOR2.7 154.46,8.56 154.46,8.83 153.76,9.53 153.76,11.4 SENSOR2.1 153.76,11.46 153.76,11.74 154.25,12.23 156.4,12.23 156.61,12.02 | 156.61,12.02 156.67,12.02 162.42,17.77 165.05,17.77 J3.1 165.12,17.84 165.4,17.84 166.02,18.46 166.02,29.19 154.8,40.41 154.8,40.48 | J2.MP4 164.57,59.39 164.01,58.83 164.01,57.72 J2.A12 164.01,57.59 164.01,57.38 J2.B1 163.94,57.38 151,57.38 144.28,50.66 144,50.66 D1.2 143.93,50.59 143.66,50.31 140.75,50.31 C5_USB.2 140.68,50.31 138.46,50.31 133.96,54.81 133.96,55.16 133.47,55.65 132.23,55.65 131.47,54.88 U4.9 | TP5.TP 164.57,63.68 164.57,59.45 J2.MP4 | J2.MP4 164.64,59.45 168.52,59.45 J2.MP2 168.52,59.39 168.52,49.27 J2.MP1 168.52,49.21 164.64,49.21 J2.MP3 | R2-USB.2 148.43,51.21 148.43,49.41 146.56,47.54 C4_USB.2 146.49,47.48 145.32,46.3 145.32,45.6 R2-USB1.1 145.32,45.54 145.32,41.03 145.87,40.48 154.8,40.48 | J2.B12 164.01,51.21 164.01,51.01 J2.A1 164.08,50.94 164.08,49.69 164.57,49.21 J2.MP3 | 154.8,40.48 164.01,49.69 J2.MP3 | 65.33,17.91 65.33,16.8 65.82,16.31 65.82,14.3 R4.1 | 65.33,17.91 67.34,19.91 68.38,19.91 EPD_C12.2 68.45,19.98 70.39,19.98 EPD_C11.2 70.46,20.05 70.8,20.4
  Top 0.15: D6.1 70.66,24.07 70.66,20.61 70.8,20.47 70.8,20.4 | 65.33,17.91 65.26,17.91 65.06,18.11 64.22,18.11 63.19,17.07 63.19,11.46 63.39,11.26 64.71,11.26 65.54,12.09 65.54,12.23 SJ1.1 65.61,12.37 67.69,12.37 67.76,12.43 R2.1 67.83,12.5 67.97,12.64 76.2,12.64 J1.MP2 76.27,12.71 89.64,12.71 J1.MP1 89.71,12.71 89.71,19.5 88.88,20.33 EPD_C1.2 | 78.01,20.47 79.11,20.47 EPD_C8.2 79.18,20.47 81.33,20.47 EPD_C7.2 81.47,20.47 83.27,20.47 EPD_C6.2 83.06,20.54 v83.06,21.16 | 78.01,20.47 77.31,20.47 EPD_C9.2 | 78.01,20.47 78.01,26.56 C7.2 | J1.17 80.78,15.13 80.78,14.72 81.61,13.89 84.38,13.89 85.21,14.72 85.21,15.13 J1.8 85.28,15.2 85.28,18.18 85.83,18.74 85.83,20.47 | 85.83,20.47 86.94,20.47 EPD_C2.2 87.01,20.4 88.81,20.4 EPD_C1.2 | 85.83,20.47 85.21,20.47 EPD_C5.2 85.21,20.54 v84.58,21.16 | C1_BAT.2 114.92,53.78 116.65,52.05 R2_BAT.1 116.72,51.84 116.72,51.63 119.9,48.45 121.22,48.45 124.33,51.56 124.33,53.22 | U4.9 131.74,54.47 131.05,53.78 130.77,53.78 U4.4 130.7,53.71 126.97,53.71 126.55,53.29 C2_BAT.2 126.48,53.22 124.33,53.22 | U4.1 130.77,55.23 131.05,55.23 131.74,54.54 U4.9 | U4.6 132.64,54.26 132.02,54.26 131.81,54.47 U4.9 | 124.33,53.22 123.78,53.22 123.5,52.95 MCP73831.2 123.43,52.95 123.02,52.95 121.01,54.95 113.53,54.95 106.16,47.58 | C1_BAT2.2 128.14,41.17 126.06,41.17 125.03,40.13 C3.- 124.96,40.13 119.49,40.13 118.17,41.45 118.1,41.45 | 118.1,41.45 116.72,40.06 116.72,39.93 C1_BAT1.2 116.65,39.86 116.02,39.23 114.92,39.23 112.84,41.31 112.84,41.94 R1_PWRUSB.1 112.77,42 111.73,42 106.16,47.58 | 118.1,41.45 118.1,42.21 117.55,42.77 117.41,42.77 IC4.2
  Top 0.15: 95.66,50.94 95.66,56.75 92.83,59.59 91.79,59.59 91.65,59.45 91.65,54.95 92.27,54.33 92.27,51.21 C8.2 | 95.66,50.94 94.76,50.04 C10_SUPERCAP.2 94.69,49.97 93.52,49.97 89.92,46.37 85.62,46.37 | 90.26,35.15 90.26,35.22 85.48,40 85.48,44.64 TP4.TP 85.48,44.77 85.62,44.91 85.62,46.37 | 90.26,35.15 90.26,34.04 90.06,33.83 88.46,33.83 86.52,35.77 80.91,35.77 D3.1 | 85.62,46.37 85.62,49.69 U3.13 | 106.16,47.58 102.8,50.94 95.66,50.94 | 90.26,35.15 92.13,35.15 92.27,35.01 92.27,31.82 88.81,28.36 88.81,20.47 EPD_C1.2
  Bottom 0.15: v45.8,38.2 v47.05,38.2 | v84.58,21.16 v83.06,21.16
  pour Top: -6.6,115 -6.6,-4.5 -5.8,-5.3 175.1,-5.3 179.1,-1.3 179.1,107.9 172,115
  pour Bottom: -6.9,115.1 -6.9,-5.4 -4.6,-7.7 185.4,-7.7 186,-7.1 186,102.9 172.1,116.8 -5.2,116.8
GPIO8
  Top 0.15: R1.1 13.81,42.14 17.97,42.14 19,43.18 19,45.6 U2.10
I2C_PW  (via drill 0.3)
  Top 0.3: C2.1 154.04,5.58 152.24,5.58 C1.1 152.1,5.65 147.46,5.65 v103,50.11 | C2.1 154.18,5.58 155.84,5.58 R1_PINH.2 155.98,5.58 157.85,5.58 R2_PINH.2 | 153.7,7.73 153.7,5.72 C2.1 | 153.7,7.73 153.7,8.49 SENSOR2.8 | 153.7,7.73 154.8,7.73 155.29,8.21 155.29,8.49 SENSOR2.6 155.29,8.7 155.29,8.9 154.53,9.66 154.53,11.4 SENSOR2.2 | v22.26,64.23 21.64,63.61 21.64,63.2 U2.17
  Bottom 0.3: v22.26,64.23 77.17,64.23 89.29,52.11 101,52.11 v103,50.11
INT_RTC  (via drill 0.3)
  Top 0.15: R1_PINH1.2 87.01,61.26 87.01,59.11 U3.3 86.94,59.04 86.94,58.69 85.76,57.52 v32.92,57.52 | v14.78,43.73 15.27,43.73 16.51,44.98 16.51,45.6 U2.8 | v15.54,39.79 16.51,38.82 TP15.TP
  Bottom 0.15: v15.54,39.79 14.78,40.55 v14.78,43.73 14.78,43.8 14.64,43.94 14.64,44.36 27.8,57.52 v32.92,57.52
IO/BOOT
  Top 0.15: R_BOOT.1 19.35,109.18 22.12,109.18 22.19,109.25 BOOT_BUTTON.4 25.72,109.25 BOOT_BUTTON.3 25.79,109.25 25.93,109.11 28.49,109.11 C6.1 28.56,109.04 29.18,108.41 29.18,107.31 24.2,102.32 24.2,63.2 U2.15
IO/CHANGE
  Top 0.15: C10.1 53.08,109.25 50.79,109.25 CHANGE_BUTTON.3 50.72,109.25 CHANGE_BUTTON.4 47.19,109.31 44.84,109.31 R_CHANGE.1 44.77,109.25 44.56,109.25 43.87,108.55 43.87,80.58 24.55,61.26 15.61,61.26 14.02,62.85 14.02,63.13 U2.23
MISO  (via drill 0.3)
  Top 0.15: 11.04,98.51 9.24,100.31 8.2,100.31 R8.1 | 11.04,98.51 12.15,98.51 D12.2 | 11.04,98.51 11.04,98.44 6.33,93.73 5.92,93.73 J4.P7 6.33,93.66 v7.86,92.14 | U1.2 31.75,55.09 31.75,55.37 32.44,56.06 32.44,60.08 31.82,60.7 TP6.TP 31.75,60.77 11.04,60.77 8.96,62.85 8.96,63.13 U2.27 8.89,63.2 8.89,63.4 v7.99,64.3
  Bottom 0.15: v7.86,92.14 7.86,64.44 v7.99,64.3
MOSI  (via drill 0.3)
  Top 0.15: 16.89,47.51 17.41,48.03 30.64,48.03 R7.1 30.71,48.1 32.65,48.1 D11.2 32.72,48.1 v34.31,48.1 | 16.89,47.51 15.27,45.88 15.27,45.67 U2.7 | v13.05,82.86 6.68,89.23 5.92,89.23 J4.P3 | 16.89,47.51 v13.53,50.87 | v83.06,17 82.3,16.24 82.3,15.2 J1.14 | v45.18,51.49 44.21,52.46 TP7.TP 44.14,52.53 39.5,52.53 U1.5
  Bottom 0.15: v13.05,82.86 13.05,51.35 v13.53,50.87 | v83.06,17 82.85,17 73.78,26.08 70.6,26.08 v45.18,51.49 45.11,51.49 41.72,48.1 v34.31,48.1
N$1
  Top 0.15: C4.1 91.58,34.52 91.16,34.52 87.28,30.65 85.9,30.65 D4.1 85.83,30.65 82.37,34.11 80.84,34.11 79.18,35.77 77.38,35.77 D3.2
N$2
  Top 0.15: R2-USB1.2 146.56,45.6 149.61,45.6 157.02,53.02 164.01,53.02 J2.A5
N$3
  Top 0.15: R1_BAT.2 120.73,49.07 120.73,49.21 123.43,51.91 MCP73831.1
N$4
  Top 0.15: C1_BAT1.1 115.33,39.93 115.33,41.73 D2.1 115.33,41.8 116.72,41.8 | 116.72,41.8 117.34,41.8 IC4.3 | 116.72,41.8 116.72,43.18 116.86,43.32 116.92,43.32 117.34,43.73 IC4.1 117.48,43.73 117.62,43.73 118.24,44.36 124.96,44.36 128.97,48.38 129.74,48.38 Q1.2
N$5
  Top 0.15: CHG_LED.C 116.86,53.78 116.86,52.81 117.34,52.32 117.34,51.42 118.38,50.38 120.66,50.38 R1_BAT.1
N$6
  Top 0.15: R2_BAT.2 117.96,51.91 120.87,51.91 MCP73831.5
N$7
  Top 0.15: J1.24 77.24,15.2 75.1,15.2 70.94,19.36 69.14,19.36 68.45,18.67 EPD_C12.1
N$8
  Top 0.15: J1.20 79.18,15.2 79.18,19.08 EPD_C8.1
N$9
  Top 0.15: J1.22 78.21,15.2 78.21,16.1 75.24,19.08 EPD_C10.1
N$10
  Top 0.15: J1.19 79.81,15.2 79.81,17.49 81.4,19.08 EPD_C7.1
N$11
  Top 0.15: J1.18 80.29,15.2 80.29,16.1 83.27,19.08 EPD_C6.1
N$12
  Top 0.15: R2-USB.1 148.5,52.6 155.36,52.6 158.75,55.99 164.01,55.99 J2.B5
N$13
  Top 0.15: J1.5 86.8,15.2 86.8,18.94 86.94,19.08 EPD_C2.1
N$14
  Top 0.15: J1.4 87.28,15.2 87.28,17.49 88.81,19.01 EPD_C1.1
N$18
  Top 0.15: IC1.5 49.96,101.77 52.31,101.77 53.08,102.53 C_DELAY.1
N$19
  Top 0.15: D7.1 88.74,63.13 89.5,63.13 92.27,60.35 R_CAPACITOR.2
PREVGH
  Top 0.15: J1.21 78.7,15.2 78.7,17.7 77.31,19.08 EPD_C9.1 77.31,19.22 76.62,19.91 76.62,20.19 75.72,21.09 75.72,27.88 76.14,28.29 76.14,36.33 76.55,36.74 85.97,36.74 88.19,34.52 89.43,34.52 D5.1
PREVGL  (via drill 0.3)
  Top 0.15: 77.31,14.51 74.68,14.51 70.46,18.74 EPD_C11.1 | 77.31,14.51 77.45,14.51 77.73,14.79 77.73,15.13 J1.23 | v89.29,29.47 89.29,30.58 D4.2 | 77.31,14.51 v77.31,14.03
  Bottom 0.15: v89.29,29.47 89.29,15.07 87.63,13.4 77.94,13.4 v77.31,14.03
RESE
  Top 0.15: J1.3 87.7,15.13 87.7,14.72 86.52,13.54 74.54,13.54 70.39,17.7 69.35,17.7 R3.2 68.59,17 68.31,17.28 65.89,17.28 Q3.2
RESE'
  Top 0.15: R3.1 69.9,16.94 67.83,14.86 67.83,13.75 R2.2 67.76,13.68 67.69,13.61 65.19,13.61 64.09,12.5 64.09,12.37 SJ1.2
RESET  (via drill 0.3)
  Top 0.15: C5.1 67.2,105.16 67.2,105.85 68.66,107.31 68.66,108.41 68.03,109.04 R_RESET.1 67.97,109.11 65.82,109.11 RESET_BUTTON.3 65.68,109.18 62.29,109.18 RESET_BUTTON.4 62.22,109.11 v57.02,109.11 | v52.45,104.54 49.96,104.54 IC1.1 | v13.53,50.24 10.21,46.92 10.21,45.67 U2.3
  Bottom 0.15: v57.02,109.11 v52.45,104.54 52.45,104.47 20.67,72.68 20.67,57.38 v13.53,50.24
RTC_RST  (via drill 0.3)
  Top 0.15: v24.27,62.02 23.78,62.02 22.88,62.92 22.88,63.13 U2.16 | v38.12,60.29 84.79,60.29 85.62,59.45 85.62,59.11 U3.4
  Bottom 0.15: v24.27,62.02 24.61,62.02 26.34,60.29 v38.12,60.29
RX
  Top 0.15: U2.24 12.7,63.2 12.7,69.77 12.43,70.05 TP2.TP
SCK  (via drill 0.3)
  Top 0.15: v83.55,16.66 82.78,15.9 82.78,15.2 J1.13 | v43.52,53.78 39.5,53.78 U1.6 | 47.19,35.15 D10.2 | 47.19,35.15 R6.1 | v14.02,44.5 14.02,45.6 U2.6 | v14.5,40.2 14.5,39.3 TP8.TP 14.43,39.16 16.03,37.57 39.23,37.57 41.65,35.15 47.19,35.15 | v7.03,91.24 6.82,91.45 5.92,91.45 J4.P5
  Bottom 0.15: v83.55,16.66 83.55,17.14 74.34,26.35 70.94,26.35 v43.52,53.78 37.29,53.78 33.06,58 27.31,58 14.09,44.77 14.02,44.77 | v14.5,40.2 14.02,40.69 v14.02,44.5 14.02,44.77 | v7.03,91.24 7.03,51.77 14.02,44.77
SCL  (via drill 0.3)
  Top 0.15: v157.09,5.02 157.85,4.26 R2_PINH.1 | v156.05,10.56 156.05,11.4 SENSOR2.4 | 135.14,49.62 135.14,46.71 161.04,20.81 164.08,20.81 | 135.14,49.62 135.14,52.6 132.99,54.75 132.71,54.75 U4.7 | 164.08,20.81 165.05,20.81 J3.4 | 164.08,20.81 v164.08,20.33 | v23.16,62.02 18.66,62.02 17.83,62.85 17.83,63.13 U2.20 | v88.6,51.14 88.6,50.94 89.43,50.11 89.43,49.76 U3.16 | v123.02,49.62 135.14,49.62
  Bottom 0.15: v157.09,5.02 157.09,9.53 v156.05,10.56 156.05,11.05 164.22,19.22 164.22,20.19 v164.08,20.33 | v23.16,62.02 23.65,62.02 24.41,62.78 39.09,62.78 50.72,51.14 v88.6,51.14 88.6,50.87 91.09,48.38 91.37,48.38 92.62,49.62 v123.02,49.62
SDA  (via drill 0.3)
  Top 0.15: v155.22,4.89 155.84,4.26 R1_PINH.1 | v155.22,10.56 155.22,11.33 155.29,11.4 SENSOR2.3 | v163.74,19.36 164.15,19.77 165.05,19.77 J3.3 | v133.47,55.02 133.27,55.23 132.71,55.23 U4.8 | v89.5,52.67 88.12,51.28 88.12,49.83 88.19,49.76 U3.15 | v23.71,64.79 20.46,64.79 19.07,63.4 19.07,63.2 U2.19
  Bottom 0.15: v155.22,4.89 v155.22,10.56 155.22,10.63 163.74,19.15 v163.74,19.36 163.74,20.05 153.42,30.37 153.42,49.83 148.22,55.02 v133.47,55.02 91.86,55.02 v89.5,52.67 89.43,52.67 77.31,64.79 v23.71,64.79
SRC  (via drill 0.3)
  Top 0.15: v90.26,35.84 91.58,35.84 C4.2 | v86.94,34.73 86.18,34.73 85.97,34.52 D5.2 85.9,34.52 80.84,34.52 78.91,36.46 76.69,36.46 76.55,36.33 76.55,35.29 78.42,33.42 79.18,33.42 L1.1 | v66.3,19.5 65.26,19.5 Q3.3
  Bottom 0.15: v90.26,35.84 88.05,35.84 v86.94,34.73 86.94,17.56 84.58,15.2 83.41,15.2 76.2,22.41 74.2,22.41 71.29,19.5 v66.3,19.5
SS_SD  (via drill 0.3)
  Top 0.15: R10.1 45.32,33.49 46.15,33.49 46.7,32.93 47.67,32.93 47.88,33.14 47.88,36.46 47.74,36.6 46.22,36.6 45.53,35.91 45.32,35.91 D8.2 45.25,35.91 v41.51,35.91 | v11.66,82.86 6.33,88.19 J4.P2 | v11.66,47.75 11.66,45.88 11.46,45.67 U2.4 11.46,45.6 11.46,44.7 12.56,43.6 13.74,43.6 14.36,44.22 v15.13,44.22
  Bottom 0.15: v11.66,47.75 v11.66,82.86 | v41.51,35.91 23.44,35.91 v15.13,44.22
TX
  Top 0.15: U2.25 11.39,63.2 11.39,68.94 10.28,70.05 TP1.TP
USB_D+  (via drill 0.3)
  Top 0.15: v137.91,51.49 143.93,51.49 D1.1 | v55.91,43.25 51.48,43.25 46.01,37.78 46.01,36.81 45.8,36.6 40.96,36.6 31.95,45.6 24.2,45.6 U2.14
  Bottom 0.15: v137.91,51.49 126.62,51.49 118.38,43.25 v55.91,43.25
USB_D-  (via drill 0.3)
  Top 0.15: v135.62,49.62 143.93,49.62 D1.3 | v57.02,42.77 55.15,44.64 v35.76,44.64 | v32.3,44.64 23.65,44.64 22.88,45.4 22.88,45.6 U2.13
  Bottom 0.15: v135.62,49.62 129.67,49.62 122.81,42.77 v57.02,42.77 | v32.3,44.64 v35.76,44.64
VBAT  (via drill 0.3)
  Top 0.3: U4.2 130.7,54.75 130.7,54.26 U4.3 130.57,54.19 v129.94,54.19 129.81,54.26 126.83,54.26 126.62,54.47 C2_BAT.1 | v128.84,53.08 128.84,50.52 Q1.3 | C2_BAT.1 126.48,54.54 124.13,54.54 123.5,53.91 MCP73831.3 | TP3.TP 126.48,58.55 126.48,54.68 C2_BAT.1
  Bottom 0.3: v129.94,54.19 v128.84,53.08
VBUS  (via drill 0.3)
  Top 0.3: 145.32,49 145.32,49.83 146.08,50.59 146.43,50.59 D1.5 146.56,50.52 146.84,50.24 v147.46,50.24 | 145.32,49 145.32,47.54 C4_USB.1 | 145.32,49 142.27,49 | 142.27,49 140.75,49 C5_USB.1 | v149.33,50.24 150.65,48.93 TP14.TP | 142.27,49 142.27,42.56 PFMF.050.1.2 | MCP73831.4 120.87,53.85 118.38,53.85 CHG_LED.A 118.24,53.91 117.62,54.54 114.29,54.54 113.6,53.85 C1_BAT.1 113.67,53.71 113.67,53.57 120.28,46.96 | R1_PWRUSB.2 112.84,43.25 114.71,43.25 115.26,43.8 D2.2 115.4,43.94 115.82,44.36 117.69,44.36 120.28,46.96 | 120.28,46.96 121.7,48.38 127.8,48.38 Q1.1 127.94,48.51 v128.56,49.14
  Bottom 0.3: v149.33,50.24 v147.46,50.24 147.32,50.18 129.6,50.18 v128.56,49.14
VRTC
  Top 0.15: R_CAPACITOR.1 92.34,58.97 92.34,54.68 94.69,52.32 C10_SUPERCAP.1 94.69,52.25 92.34,49.9 C8.1 92.27,49.83 91.58,49.83 90.26,48.51 87.84,48.51 87.01,49.34 87.01,49.69 U3.14
VUSB
  Top 0.3: J2.A9 164.01,56.82 164.01,56.62 J2.B4 164.15,56.48 164.78,56.48 165.26,55.99 165.26,52.67 164.71,52.11 164.15,52.11 J2.B9 164.01,51.77 J2.A4 163.88,51.7 156.26,51.7 147.12,42.56 146.77,42.56 PFMF.050.1.1